# Altium PCB PCB-Support-STM32F407.PcbDoc (part 1 of 3)
Units mm, origin at the board's own origin, x right, y up, seen from the top; angles counter-clockwise.
Board outline 200 x 110 mm, 4 copper layers (Top Layer, Int1 (GND), Int2 (PWR), Bottom Layer), stack 1.369 mm thick; 116 components, 132 nets, 504 pads, 919 vias.
Unrouted connection lines stored in the file: 2.
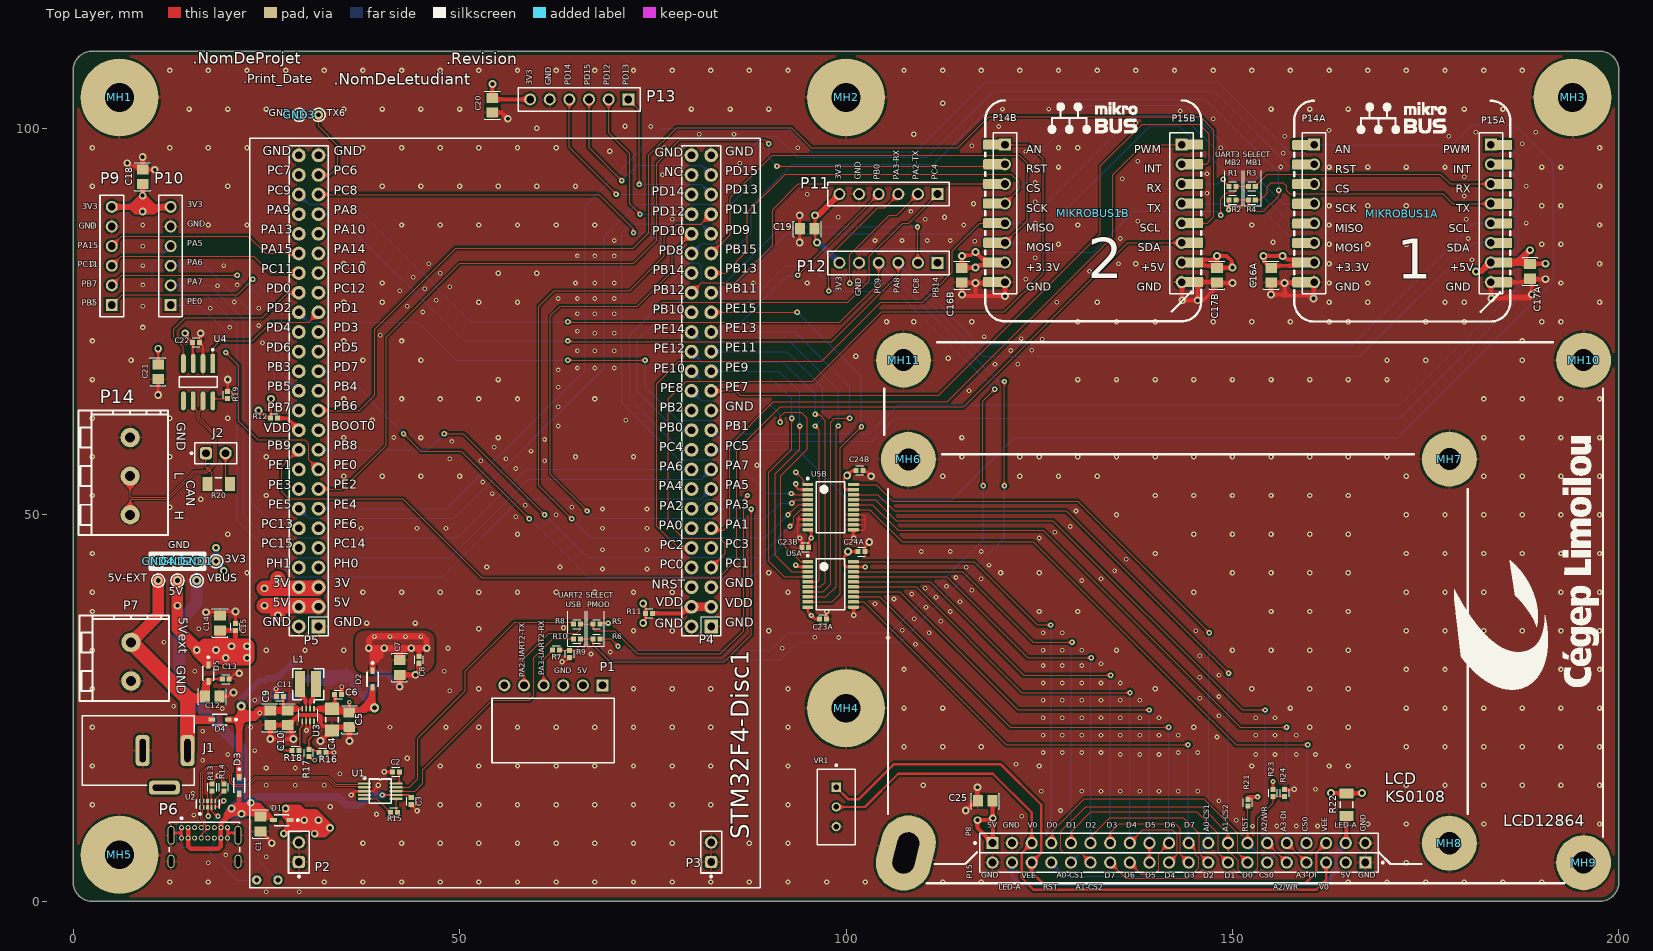
[diagram p0: Top Layer view]
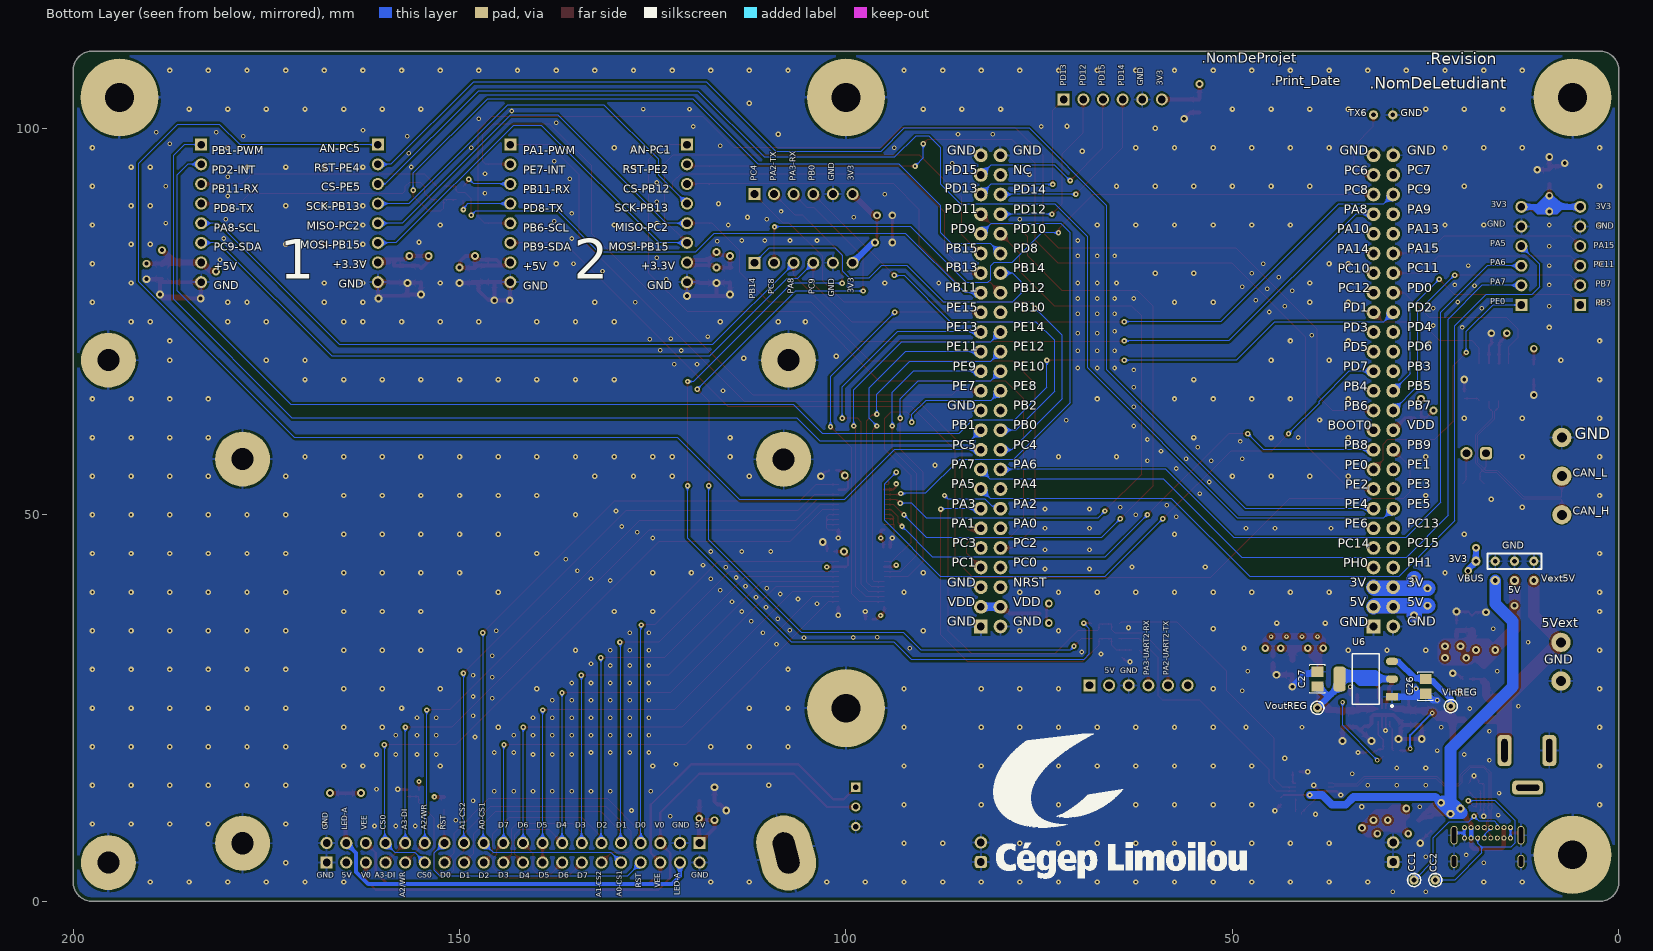
[diagram p1: Bottom Layer view, seen from below]
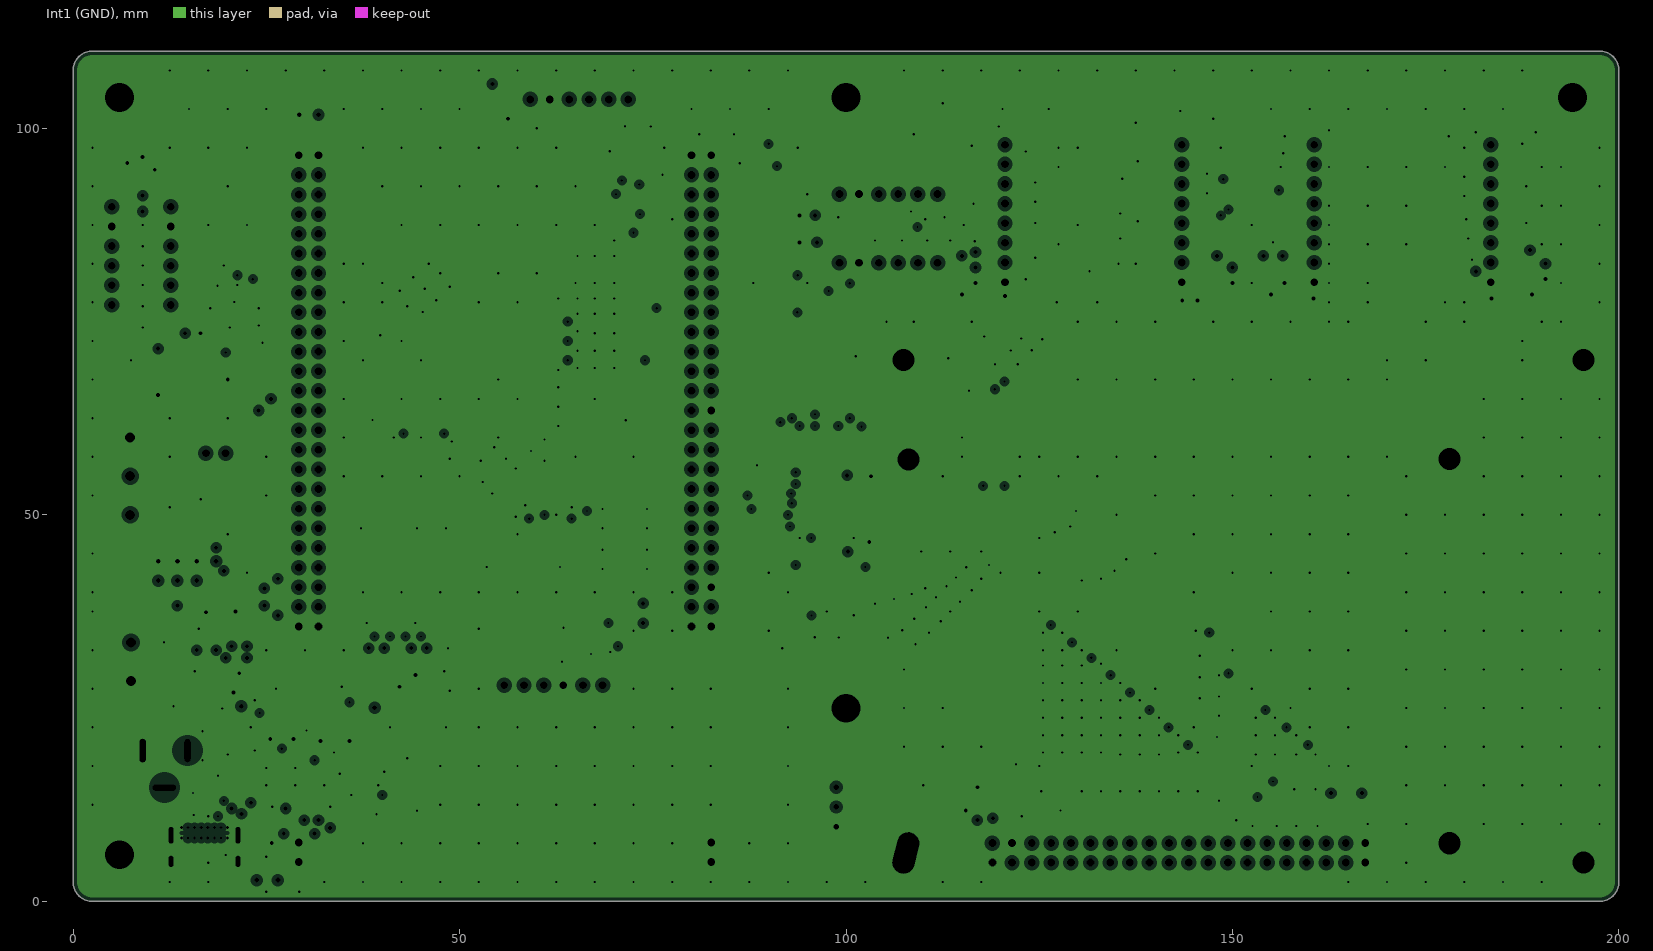
[diagram p2: Int1 (GND), clearances drawn from the general rule]
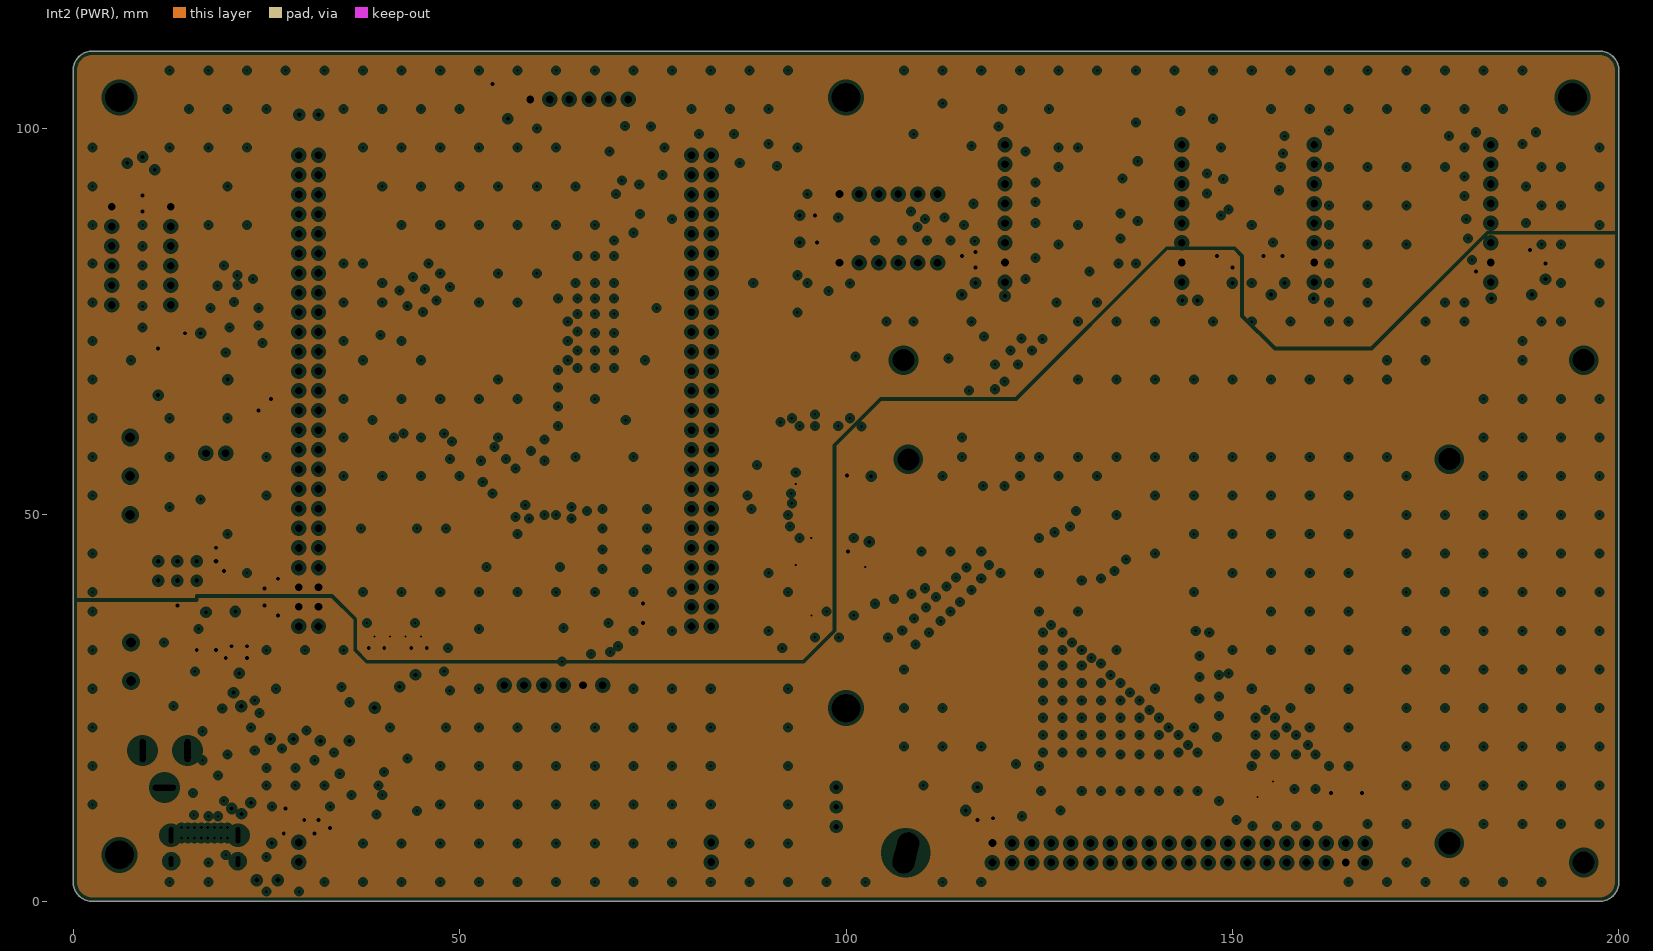
[diagram p3: Int2 (PWR), clearances drawn from the general rule]
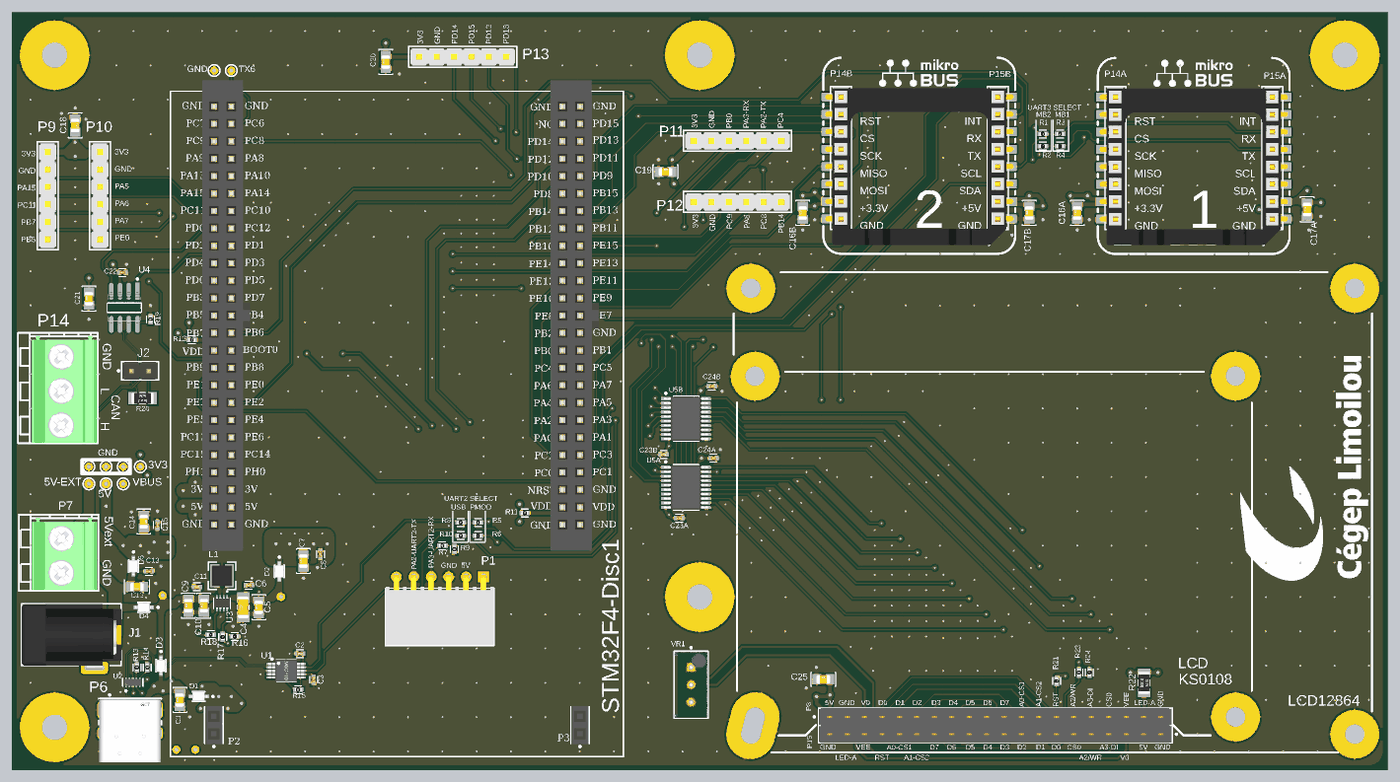
[diagram p6: 3D render of the assembled board from above, using the file's embedded part models]
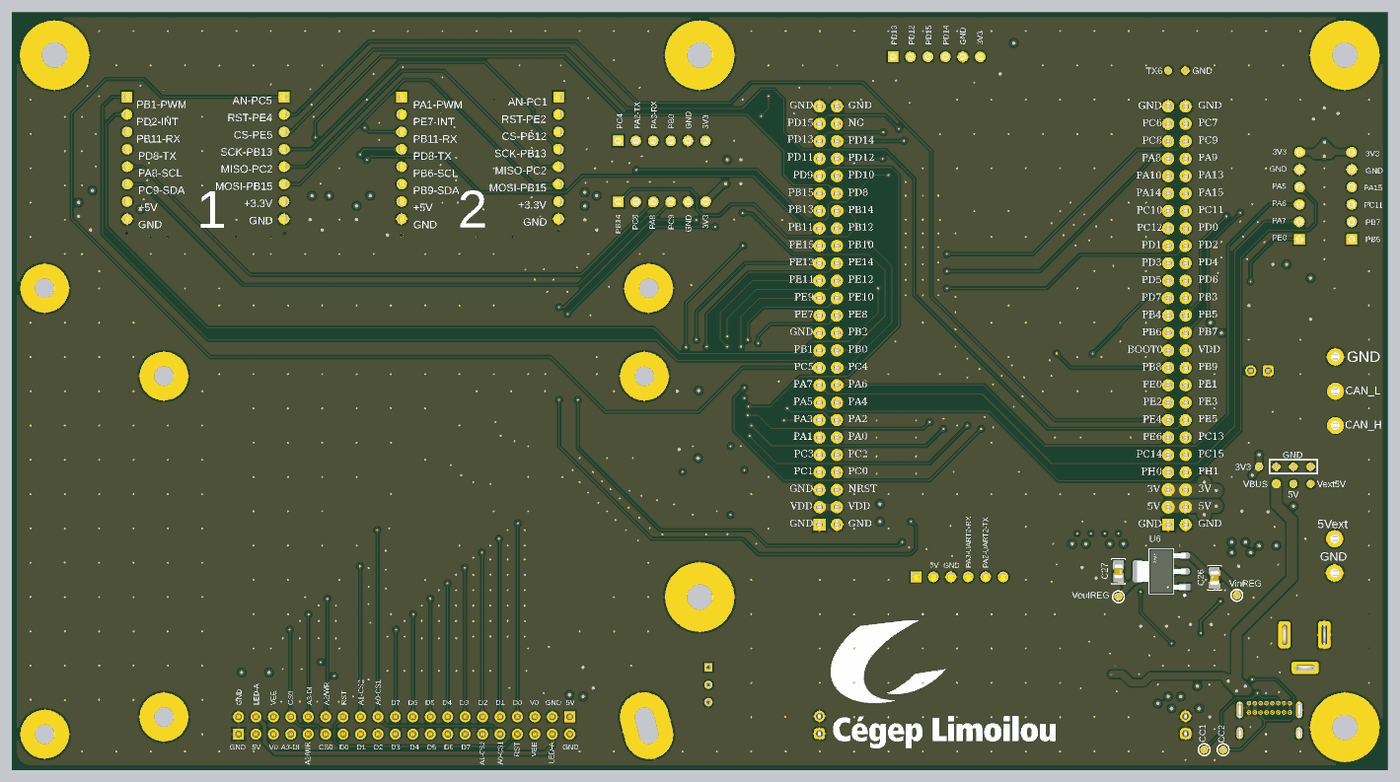
[diagram p7: 3D render of the assembled board from below, using the file's embedded part models]

## Layer stack, top to bottom
Top Solder: solder mask 0.0254, SM-001, Dk 4
Top Layer: signal copper 0.035
Dielectric 1: prepreg 0.1295, PP-017, Dk 4.3
Dielectric 2: prepreg 0.1295, PP-017, Dk 4.3
Int1 (GND): plane copper 0.035, net GND
Dielectric 3: core 0.7112, Core-039, Dk 4.8
Int2 (PWR): plane copper 0.035, net (Multiple Nets)
Dielectric 4: prepreg 0.1295, PP-017, Dk 4.3
Dielectric 5: prepreg 0.1295, PP-017, Dk 4.3
Bottom Layer: signal copper 0.035
Bottom Solder: solder mask 0.0254, SM-001, Dk 4

## Board outline
2.5,0 cw(c2.5,2.5) 0,2.5 0,107.5 cw(c2.5,107.5) 2.5,110 197.5,110 cw(c197.5,107.5) 200,107.5 200,2.5 cw(c197.5,2.5) 197.5,0

## Design rules (kind name [scope] priority, off if disabled: settings)
BoardOutlineClearance [All] p1: gap=0.5 ignorepadtopadclearanceinfootprint=FALSE
Clearance Clearance_diifPair [InDifferentialPair('CAN') or InDifferentialPair('USB_D')] p1: gap=0.125 ignorepadtopadclearanceinfootprint=FALSE
Clearance Clearance_poly [inpoly] p2: gap=0.25 ignorepadtopadclearanceinfootprint=FALSE
Clearance [All] p3: gap=0.15 ignorepadtopadclearanceinfootprint=FALSE
DiffPairsRouting [All] p1: maxlimit=0.125 minlimit=0.125 mostfreqgap=0.125 toplayer_minwidth=0.125 toplayer_maxwidth=0.125 toplayer_prefwidth=0.125 bottomlayer_minwidth=0.125 bottomlayer_maxwidth=0.125 bottomlayer_prefwidth=0.125 maxuncoupledlength=15
HoleSize [All] p1: absolutevalues=TRUE maxlimit=5.5 minlimit=0.2 maxpercent=80.000 minpercent=20.000
HoleToHoleClearance [All] p1: gap=0.3 allowstackedmicrovias=TRUE
MinimumSolderMaskSliver [All] p1: minsoldermaskwidth=0.099
PlaneClearance [All] p1: clearance=0.5
PlaneConnect [All] p1: pad.planeconnectstyle=Relief pad.reliefexpansion=0.25 pad.reliefentries=4 pad.reliefconductorwidth=0.5 pad.reliefairgap=0.25 via.planeconnectstyle=Direct via.reliefexpansion=0.508 via.reliefentries=4 via.reliefconductorwidth=0.254 via.reliefairgap=0.254
PolygonConnect [All] p1: thpad.connectstyle=Relief thpad.reliefconductorwidth=0.3 thpad.reliefentries=4 thpad.polygonreliefangle="90 Angle" thpad.airgapwidth=0.3 smdpad.connectstyle=Relief smdpad.reliefconductorwidth=0.3 smdpad.reliefentries=4 smdpad.polygonreliefangle="90 Angle" smdpad.airgapwidth=0.3 via.connectstyle=Direct via.reliefconductorwidth=0.254 via.reliefentries=4 via.polygonreliefangle="90 Angle" via.airgapwidth=0.254
RoutingVias [All] p1: holewidth=0.5 width=1 viastyle="Through Hole" minholewidth=0.3 minwidth=0.6 maxholewidth=0.7 maxwidth=1.2
SilkToSilkClearance [All] p1: silktosilkclearance=0
SilkToSolderMaskClearance [IsPad] p1: minsilkscreentomaskgap=0 clearancetoexposedcopper=TRUE
SolderMaskExpansion [All] p1: expansion=0.05 istentingtop=FALSE
SupplyNets "Schematic Supply Nets_4" [InNet('V5V_EXT')] p1: voltage=0.000
SupplyNets "Schematic Supply Nets_7" [InNet('VDDB')] p2: voltage=0.000
SupplyNets "Schematic Supply Nets_5" [InNet('VDDA')] p3: voltage=0.000
SupplyNets "Schematic Supply Nets_3" [InNet('VBUS')] p4: voltage=0.000
SupplyNets "Schematic Supply Nets_2" [InNet('VCC_3V3')] p5: voltage=0.000
SupplyNets "Schematic Supply Nets_1" [InNet('VCC_5V')] p6: voltage=0.000
SupplyNets "Schematic Supply Nets" [InNet('GND')] p7: voltage=0.000
Width [All] p1: maxlimit=5 minlimit=0.125 preferedwidth=0.15
22 further rules are at their usual default settings.

## Classes and differential pairs
component class U_Alimentation: 3V3 5V 5V-EXT C4 C5 C6 C7 C8 C9 C10 C11 C12 C13 C14 C15 C26 C27 D1 D2 D3 D4 D5 GND1 GND2 GND4 J1 L1 P7 R16 R17 R18 U3 U6 VBUS VinREG VoutREG
channel class Level-Translator: Level-Translator1 Level-Translator2
component class Level-Translator2: C23B C24B U5B
component class Level-Translator1: C23A C24A U5A
component class LCD-Connecteur-ST7920: MH9 MH10 MH11 P15
component class LCD-Connecteur-KS0108: MH6 MH7 MH8 P8
component class CAN-Driver: C21 C22 J2 P14 R19 R20 U4
net class PMOD: PA5/SPI1-CLK PA6/SPI1-MISO PA7/SPI1-MOSI PA8/I2C3-SCL PA15/D3 PB0/D1 PB5/D0 PB7/D1 PB14/D2 PC4/D0 PC8/D3 PC9/I2C3-SDA PC11/D2 PD12 PD13 PD14 PD15 PE0/CS_B PMOD-RX PMOD-TX
net class MB2: MB1-RX MB1-TX PA8/I2C3-SCL PB1/TIM-3/8 PB13/SPI2-SCK PB15/SPI2-MOSI PC2/SPI2-MISO PC5/ADC12-IN15 PC9/I2C3-SDA PD2/INT PE4/RST PE5/CS
net class MB1: MB2-RX MB2-TX PA1/TIM-2/5 PB6/I2C1-SCL PB9/I2C1-SDA PB12/CS PB13/SPI2-SCK PB15/SPI2-MOSI PC1/ADC123-IN11 PC2/SPI2-MISO PE2/RST PE7/INT
net class LCD: PB8/CS0 PD7/A0 PD9/A1 PD10/A2 PD11/A3 PE8/D0 PE9/D1 PE10/D2 PE11/D3 PE12/D4 PE13/D5 PE14/D6 PE15/D7
net class USB-CAN: PD0/CAN-RX PD1/CAN-TX USB-UART-RX USB-UART-TX
component class USB-Power: C1 C2 C3 CC1 CC2 P6 R13 R14 R15 U1 U2
component class PMOD-Connecteur: C18 C19 C20 P9 P10 P11 P12 P13 PMOD_1 PMOD_2
channel class MikroBus-Connecteur: "MikroBus-Connecteur 1" "MikroBus-Connecteur 2"
component class "MikroBus-Connecteur 2": C16B C17B MIKROBUS1 MIKROBUS1B P14B P15B
component class "MikroBus-Connecteur 1": C16A C17A MIKROBUS1A MIKROBUS2 P14A P15A
component class Affichage-LCD: C25 R21 R22 R23 R24 VR1
component class STM32Disc1-Interface: P2 P3 P4 P5 R11 R12
component class PCB-Support-STM32F407: GND3 m MH1 MH2 MH3 MH4 MH5 P1 R1 R2 R3 R4 R5 R6 R7 R8 R9 R10 TX6
differential pair USB_D: +USB_D_P -USB_D_N
differential pair CAN: +CAN_P -CAN_N

## Components (designator, comment, footprint, x,y, rotation, side; value= is the part's Value field where it differs from the comment)
3V3 "DNP" TP_TH061 18.5,44 r90 top locked
5V "DNP" TP_TH061 13.5,41.5 r90 top locked
5V-EXT "DNP" TP_TH061 11,41.5 r90 top locked
C1 "Cap 4.7uF 0805" C_2012[0805] 24.25,10 r90 top value=4.7uF
C2 "Cap 100nF 0402" C_1005[0402] 41.75,16.75 r0 top value=100nF
C3 "Cap 100nF 0402" C_1005[0402] 43.75,12.95 r90 top value=100nF
C4 "Cap 100uF 1206" C_3216[1206] 33.5,23.5 r90 top value=100uF
C5 "Cap 4.7uF 0805" C_2012[0805] 35.75,23.5 r90 top value=4.7uF
C6 "Cap 100nF 0402" C_1005[0402] 34.3,26.75 r180 top value=100nF
C7 "Cap 4.7uF 0805" C_2012[0805] 42.25,30.25 r90 top value=4.7uF
C8 "Cap 100nF 0402" C_1005[0402] 44.75,31.25 r90 top value=100nF
C9 "CAP CER 10uF 25V X5R 0805" C_2012[0805] 25.5,23.75 r90 top value=10uF
C10 "CAP CER 10uF 25V X5R 0805" C_2012[0805] 27.75,23.75 r90 top value=10uF
C11 "Cap 100nF 0402" C_1005[0402] 26.75,26.5 r0 top value=100nF
C12 "Cap 4.7uF 0805" C_2012[0805] 18,26.5 r180 top value=4.7uF
C13 "Cap 100nF 0402" C_1005[0402] 19.75,28.75 r180 top value=100nF
C14 "Cap 4.7uF 0805" C_2012[0805] 19,36 r270 top value=4.7uF
C15 "Cap 100nF 0402" C_1005[0402] 21,35.5 r270 top value=100nF
C16A "Cap 4.7uF 0805" C_2012[0805] 155,81 r90 top value=4.7uF (schematic designator C16)
C16B "Cap 4.7uF 0805" C_2012[0805] 115,81 r90 top value=4.7uF (schematic designator C16)
C17A "Cap 4.7uF 0805" C_2012[0805] 188.5,81.5 r90 top value=4.7uF (schematic designator C17)
C17B "Cap 4.7uF 0805" C_2012[0805] 148,81 r90 top value=4.7uF (schematic designator C17)
C18 "Cap 4.7uF 0805" C_2012[0805] 9,93.75 r270 top value=4.7uF
C19 "Cap 4.7uF 0805" C_2012[0805] 95,87 r0 top value=4.7uF
C20 "Cap 4.7uF 0805" C_2012[0805] 54.25,103 r90 top value=4.7uF
C21 "Cap 4.7uF 0805" C_2012[0805] 11,68.5 r90 top value=4.7uF
C22 "Cap 100nF 0402" C_1005[0402] 15.89,72.31 r180 top value=100nF
C23A "Cap 100nF 0402" C_1005[0402] 97,36.5 r180 top value=100nF (schematic designator C23)
C23B "Cap 100nF 0402" C_1005[0402] 94.727,45.79 r0 top value=100nF (schematic designator C23)
C24A "Cap 100nF 0402" C_1005[0402] 102,45.25 r180 top (schematic designator C24)
C24B "Cap 100nF 0402" C_1005[0402] 101.75,55.75 r180 top (schematic designator C24)
C25 "Cap 4.7uF 0805" C_2012[0805] 118,13 r0 top value=4.7uF
C26 "CAP CER 10uF 25V X5R 0805" C_2012[0805] 25,27.8 r90 bottom value=DNP
C27 "CAP CER 10uF 25V X5R 0805" C_2012[0805] 39,28.75 r270 bottom value=DNP
CC1 "DNP" TP_TH061 26.5,2.75 r180 bottom
CC2 "DNP" TP_TH061 23.75,2.75 r90 bottom
D1 "BAT60JFILM" SOD323 27,10.5 r180 top
D2 "BAT60JFILM" SOD323 38.75,28.75 r270 top
D3 "BAT60JFILM" SOD323 21.5,15 r270 top
D4 "BAT60JFILM" SOD323 19,23.5 r180 top
D5 "BAT60JFILM" SOD323 17.5,29.5 r270 top
GND1 "GND" TP_TH061 16,44 r0 top locked value=DNP
GND2 "GND" TP_TH061 13.5,44 r90 top locked value=DNP
GND3 "GND" TP_TH061 29.25,101.75 r0 top value=DNP
GND4 "GND" TP_TH061 11,44 r0 top locked value=DNP
J1 "694106301002" CONN_DC-JACK_RA 8.45,19.5 r270 top
J2 "61300211121" CONN_HDR_2POS_100MILS_TH 18.455,57.975 r0 top value=R120
L1 "Ind 1UH 2.75A 51mOHM SMD" L_3030[1212] 30.4,28.1 r0 top value=1uH
MH1 "DNP" MP_M-Hole_#4-40_LOOSE-FIT 6,104 r0 top locked
MH2 "DNP" MP_M-Hole_#4-40_LOOSE-FIT 100,104 r90 top locked
MH3 "DNP" MP_M-Hole_#4-40_LOOSE-FIT 194,104 r90 top locked
MH4 "DNP" MP_M-Hole_#4-40_LOOSE-FIT 100,25 r0 top locked
MH5 "DNP" MP_M-Hole_#4-40_LOOSE-FIT 6,6 r0 top locked
MH6 "DNP" MP_M-Hole_M2.5x0.45mm_LOOSE-FIT 108.066,57.184 r90 top
MH7 "DNP" MP_M-Hole_M2.5x0.45mm_LOOSE-FIT 178.066,57.209 r90 top locked
MH8 "DNP" MP_M-Hole_M2.5x0.45mm_LOOSE-FIT 178.066,7.509 r90 top locked
MH9 "DNP" MP_M-Hole_M2.5x0.45mm_LOOSE-FIT 195.441,5.009 r90 top locked
MH10 "DNP" MP_M-Hole_M2.5x0.45mm_LOOSE-FIT 195.441,70.009 r90 top locked
MH11 "DNP" MP_M-Hole_M2.5x0.45mm_LOOSE-FIT 107.441,70.009 r90 top locked
MIKROBUS1A "MIKROBUS HOST CONN." "MIKROBUS HOST CONN. SMD-NO HOLE" 171.967,88.144 r0 top locked (schematic designator MIKROBUS1)
MIKROBUS1B "MIKROBUS HOST CONN." "MIKROBUS HOST CONN. SMD-NO HOLE" 131.98,88.175 r0 top locked (schematic designator MIKROBUS1)
P1 "PPTC061LGBN-RC" P_CONN_HDR_1ROW_6POS_RA_100MIL 62.15,27.94 r180 top
P2 "ZX-PM2.54-1-2PY" CONN_SKT_2POS_100MILS_TH 29.21,6.35 r90 top
P3 "ZX-PM2.54-1-2PY" CONN_SKT_2POS_100MILS_TH 82.55,6.35 r90 top
P4 "ZX-PM2.54-2-25PY" CONN-HEAD02X25-100MIL 81.28,66.04 r90 top
P5 "ZX-PM2.54-2-25PY" CONN-HEAD02X25-100MIL 30.48,66.04 r90 top
P6 "USB4085-GF-A" FP-USB4085-GF-A-MFG 17,5.5 r0 top
P7 "ZX-DG28V-5.0-2P" CONN_TERM_BLOCK_2POS_5mm_Model1 7.5,31 r90 top
P8 "ESQ-120-14-G-S" CONN-SKT-20POS-100MIL 143.071,7.539 r0 top locked
P9 "ZX-PM2.54-1-6PY" CONN_SKT_01X06_100MIL 5,83.5 r90 top locked
P10 "ZX-PM2.54-1-6PY" CONN_SKT_01X06_100MIL 12.62,83.5 r90 top locked
P11 "ZX-PM2.54-1-6PY" CONN_SKT_01X06_100MIL 105.5,91.5 r180 top
P12 "ZX-PM2.54-1-6PY" CONN_SKT_01X06_100MIL 105.5,82.61 r180 top
P13 "ZX-PM2.54-1-6PY" CONN_SKT_01X06_100MIL 65.48,103.75 r180 top
P14 "ZX-DG28V-5.0-3P" CONN_TERM_BLOCK_3POS_5mm_Model1 7.381,55.006 r90 top value=CAN
P14A "ZX-PM2.54-1-8PY" CONN_SKT_01X08_100MIL 160.57,89 r270 top locked (schematic designator P14)
P14B "ZX-PM2.54-1-8PY" CONN_SKT_01X08_100MIL 120.57,89 r270 top locked (schematic designator P14)
P15 "ESQ-120-14-G-S" CONN-SKT-20POS-100MIL 143.071,5.009 r180 top locked
P15A "ZX-PM2.54-1-8PY" CONN_SKT_01X08_100MIL 183.43,89 r270 top locked (schematic designator P15)
P15B "ZX-PM2.54-1-8PY" CONN_SKT_01X08_100MIL 143.43,89 r270 top locked (schematic designator P15)
R1 "Res 0R 0402" R_1005[0402] 150,92.5 r0 top value=DNP
R2 "Res 0R 0402" R_1005[0402] 150,90.75 r0 top value=DNP
R3 "Res 0R 0402" R_1005[0402] 152.5,92.5 r180 top value=0R
R4 "Res 0R 0402" R_1005[0402] 152.5,90.75 r180 top value=0R
R5 "Res 0R 0402" R_1005[0402] 67.71,35.865 r180 top value=DNP
R6 "Res 0R 0402" R_1005[0402] 67.71,33.96 r180 top value=DNP
R7 "Res 5k1 1% 0402" R_1005[0402] 62.5,32.5 r180 top value=5k1
R8 "Res 0R 0402" R_1005[0402] 65.17,35.865 r0 top value=0R
R9 "Res 10k 1% 0402" R_1005[0402] 64.25,32 r90 top value=10k
R10 "Res 0R 0402" R_1005[0402] 65.17,33.96 r0 top value=0R
R11 "Res 0R 0402" R_1005[0402] 74.5,37.25 r0 top value=0R
R12 "Res 0R 0402" R_1005[0402] 26,62.5 r0 top value=0R
R13 "Res 5k1 1% 0402" R_1005[0402] 18,14.75 r270 top value=5k1
R14 "Res 5k1 1% 0402" R_1005[0402] 19.5,14.75 r270 top value=5k1
R15 "Res 4k7 1% 0402" R_1005[0402] 41.5,11.5 r0 top value=DNP
R16 "Res 91k 1% 0402" R_1005[0402] 32.25,19.25 r180 top value=91k
R17 "Res 511k 1% 0402" R_1005[0402] 30.5,19.2 r270 top value=511k
R18 "Res 10k 1% 0402" R_1005[0402] 28.75,19.5 r180 top value=10k
R19 "Res 10k 1% 0402" R_1005[0402] 20,65.5 r270 top value=10k
R20 "Res 120R 1206" R_3216[1206] 18.825,53.975 r0 top value=120R
R21 "Res 10k 1% 0402" R_1005[0402] 152,12.75 r90 top value=10k
R22 "Res 20R 1206" R_3216[1206] 164.75,12.5 r270 top value=20R
R23 "Res 49k9 1% 0402" R_1005[0402] 155.25,14 r90 top value=49k9
R24 "Res 49k9 1% 0402" R_1005[0402] 156.75,14 r270 top value=DNP
TX6 "DNP" TP_TH061 31.75,101.75 r0 top
U1 "CH340X" U_MSOP50P300X500-10(RM-10)_WO-TP 39.75,14.25 r270 top
U2 "TPD4E05U06QDQARQ1" U_USON50P250X100-10 17.405,12.565 r180 top
U3 "TPS631000DRLR" U_SOT583_50P210X120X60-8 30.4,24.1 r180 top
U4 "SN65HVD230DR" SOIC-8 16.17,67.166 r270 top
U5A "TXB0108PWR" U_TSSOP65P660X450-20 98,41 r0 top (schematic designator U5)
U5B "TXB0108PWR" U_TSSOP65P660X450-20 98,51 r0 top (schematic designator U5)
U6 "AMS1117-3.3" SOT-223 32.75,28.75 r0 bottom value=DNP
VBUS "DNP" TP_TH061 16,41.5 r90 top
VinREG "DNP" TP_TH061 21.75,25.25 r90 bottom
VoutREG "DNP" TP_TH061 39,25.033 r90 bottom
VR1 "3296W-1-103LF" R-POT-TH-TOP 98.745,12.21 r180 top

## Footprints (in the part's own frame and the unit in brackets; to place one, negate y for a bottom-side part, rotate by r counter-clockwise, add the part's x,y. Pads: shape width x height; smd on the part's side, far side on the other; paste and mask are expansions set on the pad)
C_1005[0402] [mm] "Capacitor MLCC; Body 1.1 x 0.5 mm (LxW typ)"
  rect 0.65x0.65 smd mask+0.075: 1(-0.45,0) 2(0.45,0)
  silkscreen extent -0.5,-0.57 0.5,0.58, body extent -0.51,-0.25 0.51,0.25, height 0.51
C_2012[0805] [mm] "Capacitor MLCC; Body 2.0 x 1.3 mm (LxW typ)"
  rect 1.3x1.5 smd: 1(-0.95,0) 2(0.95,0)
  silkscreen extent -1.83,-1 1.83,1, body extent -1,-0.62 1,0.63, height 0.78
C_3216[1206] [mm] "Capacitor MLCC; Body 3.2 x 1.6 mm (LxW typ)"
  rect 1.6x1.8 smd: 1(-1.4,0) 2(1.4,0)
  silkscreen extent -0.3,-0.8 0.3,0.8, body extent -1.6,-0.8 1.6,0.8, height 1
CONN-HEAD02X25-100MIL [mil]
  rect 70x70 hole 39.37: 1(-1200,-50)
  round 70 hole 39.37: 2(-1200,50) 3(-1100,-50) 4(-1100,50) 5(-1000,-50) 6(-1000,50) 7(-900,-50) 8(-900,50) 9(-800,-50) 10(-800,50) 11(-700,-50) 12(-700,50) 13(-600,-50) 14(-600,50) 15(-500,-50) 16(-500,50) 17(-400,-50) 18(-400,50) 19(-300,-50) 20(-300,50) 21(-200,-50) 22(-200,50) 23(-100,-50) 24(-100,50) 25(0,-50) 26(0,50) 27(100,-50) 28(100,50) 29(200,-50) 30(200,50) 31(300,-50) 32(300,50) 33(400,-50) 34(400,50) 35(500,-50) 36(500,50) 37(600,-50) 38(600,50) 39(700,-50) 40(700,50) 41(800,-50) 42(800,50) 43(900,-50) 44(900,50) 45(1000,-50) 46(1000,50) 47(1100,-50) 48(1100,50) 49(1200,-50) 50(1200,50)
  silkscreen extent -1248,-101 1248,100, body extent -1350,-158 1350,118, height 335
CONN-SKT-20POS-100MIL [mm]
  rect 1.57x1.57 hole 1 paste-2539.97 mask+0: 1(-24.13,0)
  round 1.57 hole 1 paste-2539.97 mask+0: 2(-21.59,0) 3(-19.05,0) 4(-16.51,0) 5(-13.97,0) 6(-11.43,0) 7(-8.89,0) 8(-6.35,0) 9(-3.81,0) 10(-1.27,0) 11(1.27,0) 12(3.81,0) 13(6.35,0) 14(8.89,0) 15(11.43,0) 16(13.97,0) 17(16.51,0) 18(19.05,0) 19(21.59,0) 20(24.13,0)
  silkscreen extent -26.51,-1.27 25.78,1.27, body extent -25.88,-1.37 25.88,1.37, height 0.25
CONN_DC-JACK_RA [mm] "DC Power Jack Right Angle"
  rrect50% 4x1.8 hole 0.8 slot 3 at 0 deg: 1(0,6.35) 2(0,0.55)
  rrect50% 1.8x4 hole 0.8 slot 3 at 90 deg: 3(4.8,3.35)
  silkscreen extent -4.5,-7.25 4.5,7.25, body extent -4.5,-7.25 5,7.25, height 10.75
CONN_HDR_2POS_100MILS_TH [mm] "Pin Header, pitch 2.54 mm, THT, Vertical, single row, 2p"
  rrect50% 1.6x1.6 hole 1: 1(-1.27,0)
  round 1.6 hole 1: 2(1.27,0)
  silkscreen extent -3.26,-1.35 2.69,1.35, body extent -2.54,-1.27 2.54,1.27, height 8.57
CONN_SKT_01X06_100MIL [mm] "SQ Post Socket, 1x6 Pins, Vertical, 2.54mm Pitch, Female"
  rect 1.55x1.55 hole 1: 1(-6.35,0)
  round 1.55 hole 1: 2(-3.81,0) 3(-1.27,0) 4(1.27,0) 5(3.81,0) 6(6.35,0)
  silkscreen extent -7.87,-1.52 7.88,1.52, body extent -7.62,-1.27 7.62,1.27, height 4.57
CONN_SKT_01X08_100MIL [mm] "SQ Post Socket, 1x8 Pins, Vertical, 2.54mm Pitch, Female"
  rect 1.55x1.55 hole 1: 1(-8.89,0)
  round 1.55 hole 1: 2(-6.35,0) 3(-3.81,0) 4(-1.27,0) 5(1.27,0) 6(3.81,0) 7(6.35,0) 8(8.89,0)
  silkscreen extent -10.41,-1.52 10.41,1.52, body extent -10.41,-1.21 10.41,1.21, height 8.51
CONN_SKT_2POS_100MILS_TH [mm] "Receptacle, pitch 2.54 mm, THT, Vertical, single row, 2p"
  rrect50% 1.6x1.6 hole 1: 1(-1.27,0)
  round 1.6 hole 1: 2(1.27,0)
  silkscreen extent -3.26,-1.35 2.69,1.35, body extent -2.79,-1.27 2.79,1.27, height 8.51
CONN_TERM_BLOCK_2POS_5mm_Model1 [mm] "Terminal Block 2 positions Throught hole"
  round 2.5 hole 1.3: 1(-2.5,0) 2(2.5,0)
  silkscreen extent -5.1,-4.9 6,6.7, body extent -4.98,-4.7 5.59,4.8, height 15.1
CONN_TERM_BLOCK_3POS_5mm_Model1 [mm] "Terminal Block 3 positions Throught hole"
  round 2.5 hole 1.3: 1(-5,0) 2(0,0) 3(5,0)
  silkscreen extent -7.6,-4.9 8.5,6.7, body extent -7.49,-4.8 8.08,4.7, height 15.1
FP-USB4085-GF-A-MFG [mm]
  rrect100% 0.9x2.4 hole 2.1 slot 0.6 at 0 deg paste-2539.97 mask+0: 1(-4.325,3.045) 2(4.325,3.045)
  rrect100% 0.9x1.7 hole 1.4 slot 0.6 at 0 deg paste-2539.97 mask+0: 3(-4.325,-0.335) 4(4.325,-0.335)
  round 0.65 hole 0.4 paste-2539.97 mask+0: A1(-2.975,4.025) A4(-2.125,4.025) A5(-1.275,4.025) A6(-0.425,4.025) A7(0.425,4.025) A8(1.275,4.025) A9(2.125,4.025) A12(2.975,4.025) B1(2.975,2.675) B4(2.125,2.675) B5(1.275,2.675) B6(0.425,2.675) B7(-0.425,2.675) B8(-1.275,2.675) B9(-2.125,2.675) B12(-2.975,2.675)
  silkscreen extent -4.57,0.89 4.57,5.37, body extent -4.87,-4.83 4.87,4.83, height 0.25
L_3030[1212] [mm]
  rect 1.3x3.4 smd: 1(-1.05,0) 2(1.05,0)
  silkscreen extent -2.01,-2.01 2.01,2.01, body extent -1.5,-1.5 1.5,1.5, height 1.22
"MIKROBUS HOST CONN. SMD-NO HOLE" [mm]
  rrect20% 2.7x1.3 smd mask+0.076: 1(-12.88,9.728) 2(-12.88,7.188) 3(-12.88,4.648) 4(-12.88,2.108) 5(-12.88,-0.432) 6(-12.88,-2.972) 7(-12.88,-5.512) 8(-12.88,-8.052) 9(12.88,-8.052) 10(12.88,-5.512) 11(12.88,-2.972) 12(12.88,-0.432) 13(12.88,2.108) 14(12.88,4.648) 15(12.88,7.188) 16(12.88,9.728)
  silkscreen extent -13.97,-13.13 13.97,15.44, body extent -13.72,-11.88 13.74,11.02, height 11.01
MP_M-Hole_#4-40_LOOSE-FIT [mm] "Monting Hole #4-40 Loose Fit"
  round 10.1 hole 3.7 paste-2539.97: 1(0,0)
MP_M-Hole_M2.5x0.45mm_LOOSE-FIT [mm] "Monting Hole M2.5x0.45mm LOOSE Fit"
  round 7.1 hole 2.85 paste-2539.97: 1(0,0)
P_CONN_HDR_1ROW_6POS_RA_100MIL [mm] "Header, 1x6 Pins, Right Angle, 2.54mm Pitch, Female"
  rect 1.55x1.55 hole 1: 1(-6.35,0)
  round 1.55 hole 1: 2(-3.81,0) 3(-1.27,0) 4(1.27,0) 5(3.81,0) 6(6.35,0)
  silkscreen extent -7.87,1.65 7.95,10.03, body extent -7.85,-0.3 7.9,9.94, height 2.46
R-POT-TH-TOP [mm]
  rect 1.2x1.2 hole 0.7 paste-2539.97 mask+0: 1(0.005,-2.54)
  round 1.2 hole 0.7 paste-2539.97 mask+0: 2(0.005,0) 3(0.005,2.54)
  silkscreen extent -2.48,-5.52 2.48,4.89, body extent -2.58,-4.99 2.58,4.99, height 0.25
R_1005[0402] [mm] "Chip Resistor; Body 1.1 x 0.5 mm (LxW typ)"
  rect 0.65x0.65 smd mask+0.075: 1(-0.45,0) 2(0.45,0)
  silkscreen extent -0.5,-0.57 0.5,0.58, body extent -0.5,-0.25 0.5,0.26, height 0.36
R_3216[1206] [mm] "Chip Resistor, Body 3.2x1.6mm, IPC Medium Density"
  rect 1.3x1.8 smd: 1(-1.45,0) 2(1.45,0)
  silkscreen extent -0.4,-0.8 0.4,0.8, body extent -1.6,-0.8 1.6,0.8, height 0.55
SOD323 [mm]
  rect 0.86x0.54 smd paste+0 mask+0: 1(-1.07,0) 2(1.07,0)
  silkscreen extent -2.2,-0.72 0.9,0.72, body extent -1.6,-0.82 1.6,0.82, height 0.25
SOIC-8 [mm]
  rect 2.469x0.622 smd paste+0 mask+0: 1(-2.414,1.905)
  rrect100% 2.469x0.622 smd paste+0 mask+0: 2(-2.414,0.635) 3(-2.414,-0.635) 4(-2.414,-1.905) 5(2.414,-1.905) 6(2.414,-0.635) 7(2.414,0.635) 8(2.414,1.905)
  silkscreen extent -4.32,-2.45 0.68,2.45, body extent -4.15,-2.95 4.15,2.95, height 0.25
SOT-223 [mm]
  rect 1.604x0.952 smd paste+0 mask+0: 1(-3.395,2.29)
  rrect100% 1.604x0.952 smd paste+0 mask+0: 2(-3.395,0) 3(-3.395,-2.29)
  rrect59% 1.604x3.262 smd paste+0 mask+0: 4(3.395,0)
  silkscreen extent -3.52,-3.25 1.75,3.62, body extent -3.53,-3.25 3.53,3.25, height 1.8
TP_TH061 [mm] "Test point hole 0.61mm diameter (AWG28)"
  round 1.2 hole 0.61: 1(0,0)
  silkscreen extent -0.85,-0.85 0.85,0.85
U_MSOP50P300X500-10(RM-10)_WO-TP [mm] "Shrink Small Outline; 10 Leads; Body Width 3 mm; Pitch 0.5 mm"
  oval 0.3x1.7 smd mask+0.05: 1(-1,-2.05) 2(-0.5,-2.05) 3(0,-2.05) 4(0.5,-2.05) 5(1,-2.05) 6(1,2.05) 7(0.5,2.05) 8(0,2.05) 9(-0.5,2.05) 10(-1,2.05)
  silkscreen extent -1.82,-2.17 1.58,1.43, body extent -1.6,-2.58 1.6,2.57, height 1.09
U_SOT583_50P210X120X60-8 [mil] "SOT-583"
  rect 9x28 smd paste+0 mask+0: 1(-29.53,-31.5) 2(-9.84,-31.5) 3(9.84,-31.5) 4(29.53,-31.5) 5(29.53,31.5) 6(9.84,31.5) 7(-9.84,31.5) 8(-29.53,31.5)
  silkscreen extent -49,-71 49,31, body extent -44,-34 44,34, height 27
U_TSSOP65P660X450-20 [mm] "SOP, 20-Leads, Body 6.6x4.5mm, Pitch 0.65mm, IPC Medium Density"
  rrect22% 1.4x0.45 smd: 1(-2.95,2.925) 2(-2.95,2.275) 3(-2.95,1.625) 4(-2.95,0.975) 5(-2.95,0.325) 6(-2.95,-0.325) 7(-2.95,-0.975) 8(-2.95,-1.625) 9(-2.95,-2.275) 10(-2.95,-2.925) 11(2.95,-2.925) 12(2.95,-2.275) 13(2.95,-1.625) 14(2.95,-0.975) 15(2.95,-0.325) 16(2.95,0.325) 17(2.95,0.975) 18(2.95,1.625) 19(2.95,2.275) 20(2.95,2.925)
  silkscreen extent -3.07,-3.3 1.85,3.82, body extent -3.21,-3.25 3.21,3.25, height 1
U_USON50P250X100-10 [mm]
  rrect50% 0.2x0.565 smd paste+0 mask+0: 1(1,0.417) 2(0.5,0.417) 4(-0.5,0.417) 5(-1,0.417) 6(-1,-0.417) 7(-0.5,-0.417) 9(0.5,-0.417) 10(1,-0.417)
  rrect25% 0.4x0.565 smd paste-0.025 mask+0: 3(0,0.417) 8(0,-0.417)
  silkscreen extent -1.48,-0.55 1.48,1.37, body extent -1.4,-0.8 1.4,0.8, height 0.25

## Part data
3V3 5V 5V-EXT CC1 CC2 TX6 VBUS VinREG VoutREG: library part TP_TH0.61mm(AWG28), "Pad TH 0.61mm diameter (AWG28)", Supplier Part Number 1=N/A, Manufacturer Part Number 1=DNP, Supplier 1=N/A
C1 C5 C7 C12 C14 C16A C16B C17A C17B C18 C19 C20 C21 C25: library part CAP003, "Capacitor type 1", Dielectric=X7R, Manufacturer 1="Taiyo Yuden", Manufacturer Part Number 1=TMK212AB7475KG-T, Rated Voltage=25V, Supplier Part Number 1=C163186, Tolerance=10%, CEGEP=KCOND02SM, LibRef=CAP003, Mounting Technology=SMT, Supplier 1=LCSC
C2 C3 C6 C8 C11 C13 C15 C22 C23A C23B C24A C24B: library part CAP001, "Capacitor type 1", Dielectric=X7R, Manufacturer 1="Taiyo Yuden", Manufacturer Part Number 1=UMK105B7104KV-FR, Rated Voltage=50V, Supplier Part Number 1=C2167491, Tolerance=10%, CEGEP=KCOND01SM, LibRef=CAP001, Mounting Technology=SMT, Supplier 1=LCSC
C4: library part CAP005, "Capacitor type 1", Dielectric=X5R, Manufacturer 1=Murata, Manufacturer Part Number 1=GRM31CR61A107MEA8L, Rated Voltage=10V, Supplier Part Number 1=C883598, Tolerance=20%, CEGEP=KCOND04SM, LibRef=CAP005, Mounting Technology=SMT, Supplier 1=LCSC
C9 C10 C26 C27: library part CAP020, "Capacitor type 1", Dielectric=X5R, Manufacturer 1=Samsung, Manufacturer Part Number 1=CL21A106KAYNNNE, Rated Voltage=25V, Supplier Part Number 1=C15850, Tolerance=10%, LibRef=CAP020, Mounting Technology=SMT, Supplier 1=LCSC
D1 D2 D3 D4 D5: library part D_BAT60, "DIODE SCHOTTKY 10V 3A SOD323", Manufacturer 1=ST, Supplier Part Number 1=C133103, Manufacturer Part Number 1=BAT60JFILM, Mounting Technology=SMT, Supplier 1=LCSC
GND1 GND2 GND3 GND4: library part TP_TH0.61mm(AWG28), "Pad TH 0.61mm diameter (AWG28)", Manufacturer Part Number 1=DNP, Supplier Part Number 1=N/A, Supplier 1=N/A
J1: library part CONN-DC-JACK-2MM5, "DC Barrel Connector 2.5mm", Manufacturer 1="XKB Connection", Manufacturer Part Number 1=DC-005-5A-2.5, Supplier Part Number 1=C381115, Mounting Technology=TH, Supplier 1=LCSC
J2: library part CONN-100MIL-HDR-01X02, "CONN HEADER 2POS 100MIL", Manufacturer 1=Megastar, Manufacturer 2="Würth Elektronik", Manufacturer Part Number 1=ZX-PZ2.54-1-2PZZ, Supplier Part Number 1=C7501260, Manufacturer Part Number 2=61300211121, Mounting Technology=TH, Supplier 1=LCSC
L1: library part IND001, "Inductor type 1", Manufacturer 1="Murata Electronics", Manufacturer Part Number 1=LQH3NPN1R0MMEL, Saturation Current=2.3A, Supplier Part Number 1=C703777, Tolerance=0,2, CEGEP=KPTSO09, DCR=0.025R, LibRef=IND001, Mounting Technology=SMT, Supplier 1=LCSC
MH1 MH2 MH3 MH4 MH5: library part MH-4-40, "Mounting Hole #4-40 w/ Flat Washer", Supplier Part Number 1=N/A, Manufacturer Part Number 1=DNP
MH6 MH7 MH8 MH9 MH10 MH11: library part MH-2.5MM, "Mounting Hole 2.5mm w/ Flat Washer", Supplier Part Number 1=N/A, Manufacturer Part Number 1=DNP
MIKROBUS1A MIKROBUS1B: library part MIKROBUS-HOST-CONN, "mikroBUS Host Socket"
P1: library part CONN-100MIL-SKT-01X06_RA, "CONN SOCKET 6pos 100mils Right Angle", Manufacturer 1=Megastar, Manufacturer 2=Sullins, Manufacturer 3=Samtec, Manufacturer Part Number 1=ZX-PM2.54-1-6PWZ, Manufacturer Part Number 3=SSW-106-02-T-S-RA, Supplier Part Number 1=C49326178, Manufacturer Part Number 2=PPTC061LGBN-RC, Mounting Technology=TH, Supplier 1=LCSC, Supplier 2=Digikey, Supplier Part Number 2=S5442-ND
P2 P3: library part CONN-100MIL-SKT-01X02, "CONN SOCKET 2pins single row , 100mils TH", Manufacturer 1=Megastar, Manufacturer 2="Würth Elektronik", Manufacturer Part Number 2=61300211121, Supplier Part Number 1=C7499322, Manufacturer Part Number 1=ZX-PM2.54-1-2PY, Mounting Technology=TH, Supplier 1=LCSC
P4 P5: library part CONN-100MIL-SKT-02X25, "CONN SOCKET 2x25POS, Dual row 100MIL", Manufacturer 1=Megastar, Manufacturer 2=Sullins, Manufacturer Part Number 2=SFH11-PBPC-D25-ST-BK, Supplier Part Number 1=C7499355, Manufacturer Part Number 1=ZX-PM2.54-2-25PY, Mounting Technology=TH, Supplier 1=LCSC, Supplier 2=Digikey, Supplier Part Number 2=S9201-ND
P6: library part CONN-USB-C-16POS, "CONN RCPT USB2.0 TYPE C RA - TH", Manufacturer 1="Global Connector Technology", Supplier Part Number 1=C7095263, Code CEGEP="? (R13-B182)", Manufacturer Part Number 1=USB4085-GF-A, Mounting Technology=TH, Supplier 1=LCSC, Supplier 2=Digikey, Supplier Part Number 2=2073-USB4085-GF-ACT-ND
P7: library part CONN-5MM-2POS-TERM-BLOCK, "CONN TERM BLOCK 2POS 5mm pitch", Manufacturer 1=Megastar, Manufacturer 2="Weidmüller - Phoenix Contact", Manufacturer Part Number 2="1760510000 - 1890963", Supplier Part Number 1=C49022995, Code CEGEP=CONWECO0002, Manufacturer Part Number 1=ZX-DG28V-5.0-2P, Mounting Technology=TH, Supplier 1=LCSC
P8 P15: library part CONN-100MIL-SKT-01X20, "CONN SOCKET 20POS 2.54MM", Manufacturer 1=Megastar, Manufacturer Part Number 1=ZX-PM2.54-1-20PY, Supplier Part Number 1=C7499336, Code CEGEP=KCONDIV0053, Localisation=R13-B035, Mounting Technology=TH, Supplier 1=LCSC
P9 P10 P11 P12 P13: library part CONN-100MIL-SKT-01X06, "CONN SOCKET 6pos 100mils", Manufacturer 1=Megastar, Supplier Part Number 1=C7499326, Manufacturer Part Number 1=ZX-PM2.54-1-6PY, Mounting Technology=TH, Supplier 1=LCSC
P14: library part CONN-5MM-3POS-TERM-BLOCK, "CONN TERM BLOCK 3POS 5mm pitch", Manufacturer 1=Megastar, Manufacturer 2="Weco - Phoenix Contact", Manufacturer Part Number 2="950-DS/03 - 1890976", Code CEGEP=CONWECO0003, Manufacturer Part Number 1=ZX-DG28V-5.0-3P, Mounting Technology=TH, Supplier 1=LCSC, Supplier Part Number 1=ZX-DG28V-5.0-3P
P14A P14B P15A P15B: library part CONN-100MIL-SKT-01X08, "CONN SOCKET 8pos 100mils", Manufacturer 1=Megastar, Supplier Part Number 1=C7499328, Manufacturer Part Number 1=ZX-PM2.54-1-8PY, Mounting Technology=TH, Supplier 1=LCSC
R1 R2 R3 R4 R5 R6 R8 R10 R11 R12: library part RES005, "Resistor type 1", Manufacturer 1=Yageo, Manufacturer Part Number 1=RC0402JR-070RL, Max Working Voltage=50V, Supplier Part Number 1=C60485, LibRef=RES005, Mounting Technology=SMT, Supplier 1=LCSC
R7 R13 R14: library part RES010, "Resistor type 1", Manufacturer 1=Panasonic, Manufacturer Part Number 1=ERJ-2RKF5101X, Max Working Voltage=50V, Supplier Part Number 1=C25905, Tolerance=1%, LibRef=RES010, Mounting Technology=SMT, Puissance=1/16W, Supplier 1=LCSC
R9 R18 R19 R21: library part RES003, "Resistor type 1", Manufacturer 1=Vishay, Manufacturer Part Number 1=CR0402F1002T1LF, Max Working Voltage=50V, Supplier Part Number 1=541-10.0KLCT-ND, Tolerance=1%, LibRef=RES003, Mounting Technology=SMT, Puissance=1/16W, Supplier 1=Digikey
R15: library part RES007, "Resistor type 1", Manufacturer 1=Panasonic, Manufacturer Part Number 1=ERJ-2RKF4701X, Max Working Voltage=50V, Supplier Part Number 1=C400631, Tolerance=1%, LibRef=RES007, Mounting Technology=SMT, Puissance=1/16W, Supplier 1=LCSC
R16: library part RES011, "Resistor type 1", Manufacturer 1=Yageo, Manufacturer Part Number 1=RC0402FR-0791KL, Max Working Voltage=50V, Supplier Part Number 1=C327323, Tolerance=1%, Code CEGEP=RES91KSM, LibRef=RES011, Mounting Technology=SMT, Puissance=1/16W, Supplier 1=LCSC
R17: library part RES012, "Resistor type 1", Manufacturer 1=Yageo, Manufacturer Part Number 1=RC0402FR-07511KL, Max Working Voltage=50V, Supplier Part Number 1=C163461, Tolerance=1%, Code CEGEP=RES511KSM, LibRef=RES012, Mounting Technology=SMT, Puissance=1/16W, Supplier 1=LCSC
R20: library part RES014, "Resistor type 1", Manufacturer 1=Yageo, Manufacturer Part Number 1=RC1206FR-07120RL, Max Working Voltage=200V, Supplier Part Number 1=C114928, Tolerance=1%, CEGEP=RESI0043SMT, LibRef=RES014, Mounting Technology=SMT, Puissance=1/4W, Supplier 1=LCSC, Supplier 2=Digikey, Supplier Part Number 2=P120ECT-ND
R22: library part RES020, "Resistor type 1", Manufacturer 1=Yageo, Manufacturer Part Number 1=RC1206FR-0720RL, Max Working Voltage=200V, Supplier Part Number 1=C114941, Tolerance=1%, CEGEP=RESI00020SMT, LibRef=RES020, Mounting Technology=SMT, Puissance=1/4W, Supplier 1=LCSC
R23 R24: library part RES026, "Resistor type 1", Manufacturer 1=Yageo, Manufacturer Part Number 1=RC0402FR-0749k9L, Max Working Voltage=50V, Supplier Part Number 1=C137969, Tolerance=1%, LibRef=RES026, Mounting Technology=SMT, Puissance=1/16W, Supplier 1=LCSC
U1: library part U_CH340X, "IC USB to Serial Port", Manufacturer 1="WCH(Jiangsu Qin Heng)", Supplier Part Number 1=C3035748, Code CEGEP=KPTSO02, Manufacturer Part Number 1=CH340X, Mounting Technology=SMT, Supplier 1=LCSC
U2: library part U_TPD4E05U06, "TVS DIODE 5.5V 14V 10USON", Manufacturer 1="Texas Instruments", Manufacturer 2=ElecSuper, Manufacturer Part Number 2=TPD4E05U06QDQARQ1-ES, Supplier Part Number 1=C81353, Manufacturer Part Number 1=TPD4E05U06QDQARQ1, Mounting Technology=SMT, Supplier 1=LCSC, Supplier 2=Digikey, Supplier Part Number 2=296-40696-1-ND
U3: library part U_TPS631000DRLR, "buck-boost converter 1.5-A output current,", Manufacturer 1="Texas Instruments", Supplier Part Number 1=C5219190, Manufacturer Part Number 1=TPS631000DRLR, Mounting Technology=SMT, Supplier 1=LCSC, Supplier 2=Digikey, Supplier Part Number 2=296-TPS631000DRLRCT-ND
U4: library part U_SN65HVD230DR, "IC TRANSCEIVER HALF 1/1 8SOIC", Manufacturer 1=TI, Supplier Part Number 1=C12084, Manufacturer Part Number 1=SN65HVD230DR, Mounting Technology=SMT, Supplier 1=LCSC
U5A U5B: library part U_TXB0108PWR, "IC 8-Bit Bidirectional Voltage-Level Translator with Auto-Direction Sensing 20-Pin TSSOP (PW)", Manufacturer 1="Texas Instruments", Supplier Part Number 1=C53406, Manufacturer Part Number 1=TXB0108PWR, Mounting Technology=SMT, Supplier 1=LCSC
U6: library part U_AMS1117-3.3, "LDO Voltage Regulators 1A, 3.3V", Manufacturer 1=UMW, Manufacturer 2="Advanced Monolithic Systems", Supplier Part Number 1=C347222, Manufacturer Part Number 1=AMS1117-3.3, Manufacturer Part Number 2=AMS1117-3.3, Mounting Technology=SMT, Supplier 1=LCSC, Supplier 2=LCSC, Supplier Part Number 2=C6186
VR1: library part RP-POT10K-MULTI-TURN-TOP-TH, "TRIMMER 10K OHM 0.5W PC PIN TOP", Manufacturer 1=JIERR, Manufacturer 2=BOURNS, Supplier Part Number 1=C49190453, Manufacturer Part Number 1=3296W-1-103LF, Manufacturer Part Number 2=3296W-1-103LF, Mounting Technology=TH, Supplier 1=LCSC, Supplier 2=LCSC, Supplier Part Number 2=C34846

## Free pads (board coordinates)
  oval 9.801x7.1 hole 2.85 slot 5.403 at 75.8 deg rot 75.8: pt20(107.75,6.25)

## Via types
v1: diameter 0.7, hole 0.3, Top Layer to Bottom Layer, tented both sides, 532 vias
v2: diameter 0.6, hole 0.3, Top Layer to Bottom Layer, tented both sides, 298 vias
v3: diameter 1, hole 0.5, Top Layer to Bottom Layer, tented both sides, 89 vias

## Nets (pads, with @x,y where several pads share a name; then routed paths per layer and width w, separated by ;. In a path a pad name is that pad's centre, name@x,y a point inside that pad or via, vN(x,y) a via of type N, cw(c..) or ccw(c..) an arc to the next point about the centre after c; other vN are vias at no path point)
CAN_N: J2.1 P14.2 U4.6 | length 26.7
  Top Layer w0.125: P14.2@7.381,55.006 7.381,52.323 7.455,52.25 12.25,52.25 15.354,55.354 15.634,55.634 15.707,55.707 17.203,55.707 17.448,55.952 ; U4.6@15.535,64.752 15.535,63.943 16.09,63.388 16.09,62.535 16.09,62.431 18.25,60.271 18.25,56.754 17.448,55.952 ; J2.1@17.185,57.975 17.185,56.215 17.448,55.952
CAN_P: P14.1 R20.1 U4.7 | length 26.4
  Top Layer w0.125: P14.1@7.381,50.006 7.381,51.927 7.455,52 12.354,52 15.81,55.457 17.307,55.457 17.625,55.775 ; U4.7@16.805,64.752 16.805,63.819 16.34,63.354 16.34,62.535 18.427,60.448 18.5,60.375 18.5,56.65 17.625,55.775 ; R20.1@17.375,53.975 17.95,54.55 17.95,55.45 17.625,55.775